# Altium PCB DE-290817.PcbDoc (part 1 of 2)
Units mil, origin at the board's own origin, x right, y up, seen from the top; angles counter-clockwise.
Board outline 2755.91 x 5118.11 mil, 2 copper layers (Top Layer, Bottom Layer); 176 components, 108 nets, 554 pads, 271 vias.
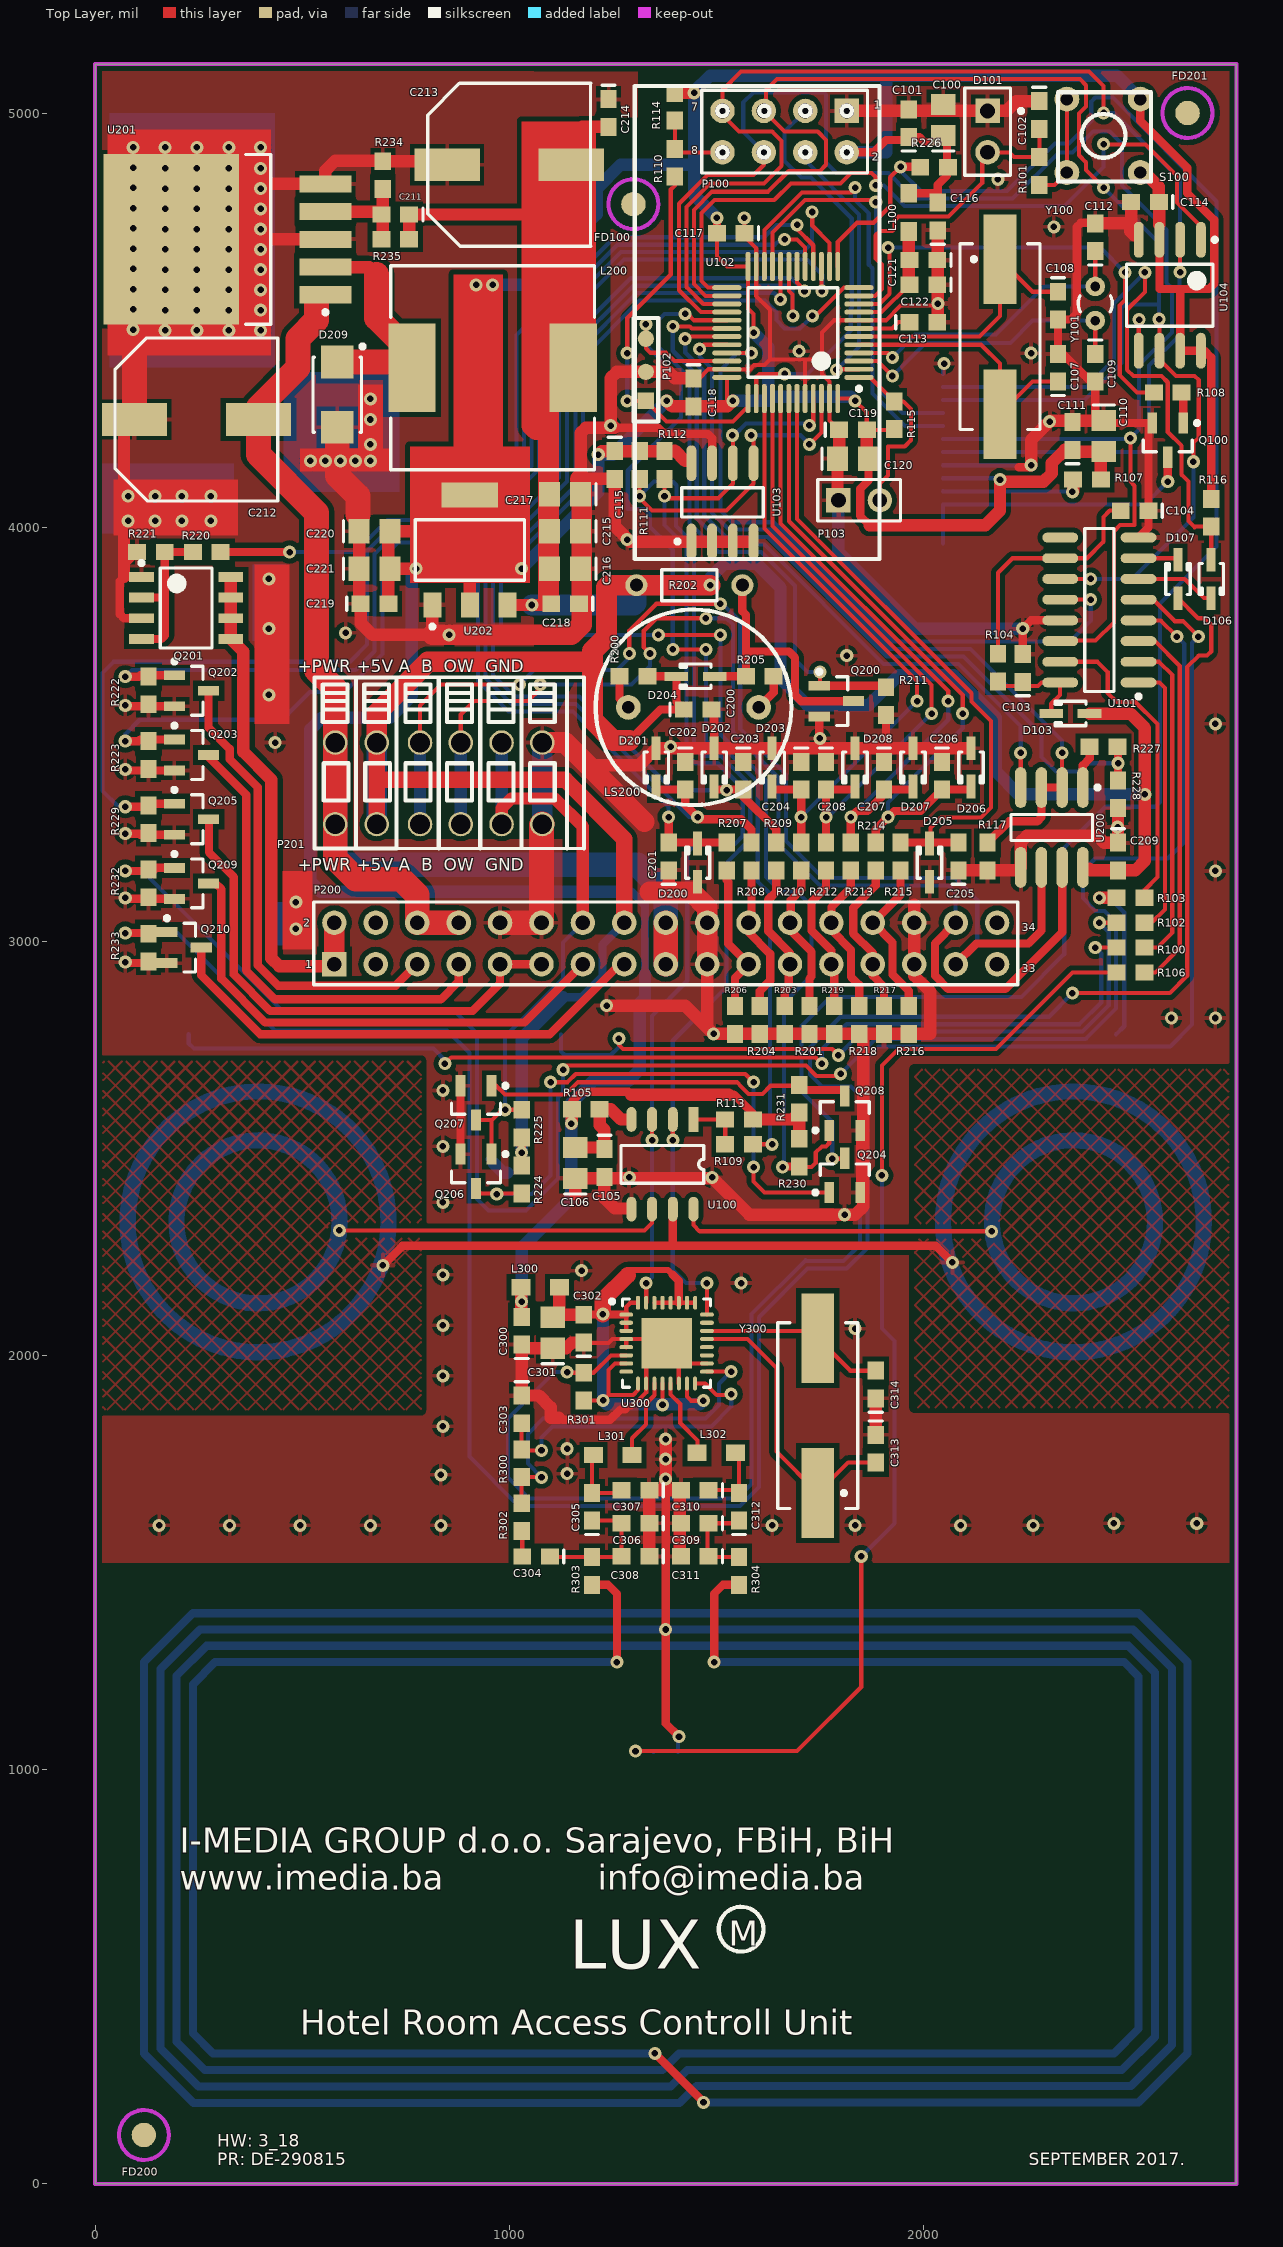
[diagram p0: Top Layer view]
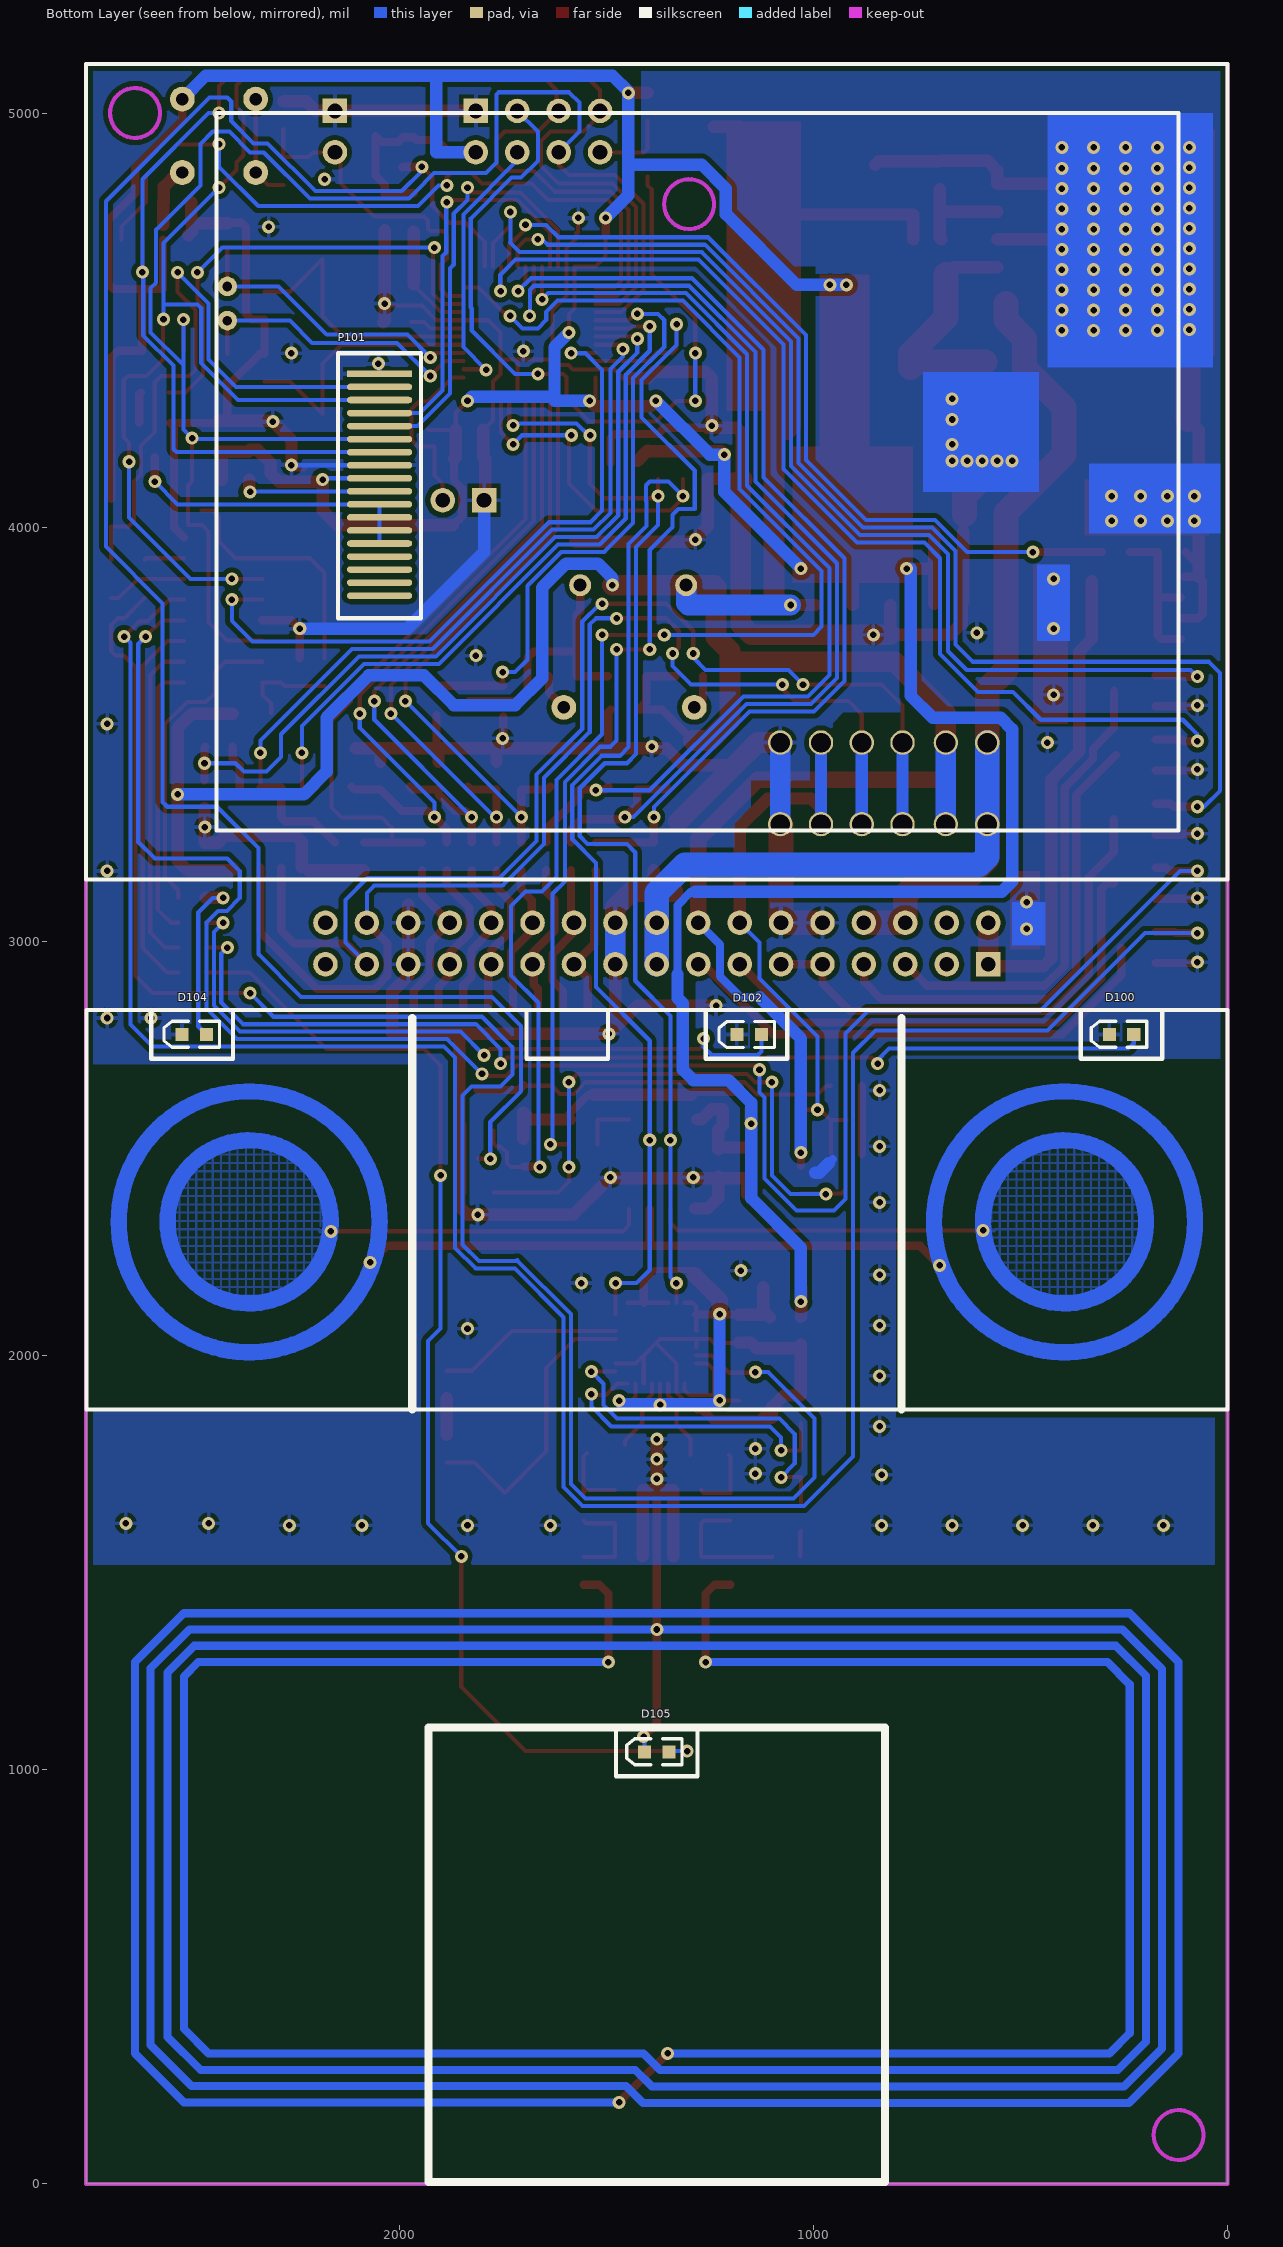
[diagram p1: Bottom Layer view, seen from below]

## Layer stack, top to bottom
Top Solder: solder mask 0.4, Solder Resist, Dk 3.5
Top Layer: signal copper 1.4
Dielectric 1: dielectric 12.6, FR-4, Dk 4.8
Bottom Layer: signal copper 1.4
Bottom Solder: solder mask 0.4, Solder Resist, Dk 3.5

## Board outline
0,0 2755.91,0 2755.91,5118.11 0,5118.11

## Design rules (kind name [scope] priority, off if disabled: settings)
Clearance [All] p1: gap=8 except(5: Arc-SMDPad Track-SMDPad SMDPad-SMDPad; 10: Arc-Arc; 12: Arc-Fill Arc-Poly Track-Fill Track-Poly SMDPad-Fill SMDPad-Poly THPad-Fill THPad-Poly Via-Fill Via-Poly Fill-Fill Fill-Poly Poly-Poly)
PolygonConnect [All] p1: connectstyle=Relief reliefconductorwidth=10 reliefentries=4 polygonreliefangle="90 Angle" airgapwidth=10
RoutingVias [All] p1: holewidth=28 width=50 viastyle="Through Hole" minholewidth=28 minwidth=50 maxholewidth=28 maxwidth=50
SolderMaskExpansion [All] p1: expansion=4
Width [All] p1: maxlimit=157.48 minlimit=5 preferedwidth=30
30 further rules are at their usual default settings.

## Classes and differential pairs
component class DE-290817_03: C300 C301 C302 C303 C304 C305 C306 C307 C308 C309 C310 C311 C312 C313 C314 L300 L301 L302 R300 R301 R302 R303 R304 U300 Y300
component class DE-290817_02: C200 C201 C202 C203 C204 C205 C206 C207 C208 C209 C211 C212 C213 C214 C215 C216 C217 C218 C219 C220 C221 D200 D201 D202 D203 D204 D205 D206 D207 D208 D209 FD200 FD201 L200 LS200 P200 P201 Q200 Q201 Q202 Q203 Q204 Q205 Q206 Q207 Q208 Q209 Q210 R200 R201 R202 R203 R204 R205 R206 R207 R208 R209 R210 R211 R212 R213 R214 R215 R216 R217 R218 R219 R220 R221 R222 R223 R224 R225 R226 R227 R228 R229 R230 R231 R232 R233 R234 R235 U200 U201 U202
component class DE-290817_01: C100 C101 C102 C103 C104 C105 C106 C107 C108 C109 C110 C111 C112 C113 C114 C115 C116 C117 C118 C119 C120 C121 C122 D100 D101 D102 D103 D104 D105 D106 D107 FD100 L100 P100 P101 P102 P103 Q100 R100 R101 R102 R103 R104 R105 R106 R107 R108 R109 R110 R111 R112 R113 R114 R115 R116 R117 S100 U100 U101 U102 U103 U104 Y100 Y101

## Components (designator, comment, footprint, x,y, rotation, side; value= is the part's Value field where it differs from the comment)
C100 "10uF" 0805 2048,4983 r90 top
C101 "100nF" 0603 1965,4975 r90 top
C102 "100nF" 0603 2280,4995 r270 top
C103 "100nF" 0603 2240,3660 r90 top
C104 "100nF" 0603 2510,4040 r180 top
C105 "100nF" 0603 1230,2465 r270 top
C106 "10uF" 0805 1160,2465 r90 top
C107 "22pF" 0603 2325,4385 r90 top
C108 "22pF" 0603 2325,4535 r270 top
C109 "6p8" 0603 2415,4385 r270 top
C110 "10uF" 0805 2435,4220 r270 top
C111 "100nF" 0603 2360,4220 r90 top
C112 "6p8" 0603 2415,4700 r90 top
C113 "100nF" 0603 2000,4495 r0 top
C114 "100nF" 0603 2535,4785 r180 top
C115 "100nF" 0603 1255,4150 r270 top
C116 "100nF" 0603 2035,4750 r90 top
C117 "100nF" 0603 1535,4710 r180 top
C118 "100nF" 0603 1445,4325 r270 top
C119 "100nF" 0603 1830,4235 r0 top
C120 "10uF" 0805 1830,4165 r0 top
C121 "1uF" 0603 2000,4645 r180 top
C122 "100nF" 0603 2000,4585 r180 top
C200 "100nF" 0603 1455,3560 r0 top
C201 "100nF" 0603 1385,3205 r90 top
C202 "100nF" 0603 1425,3400 r270 top
C203 "100nF" 0603 1565,3400 r270 top
C204 "100nF" 0603 1705,3400 r270 top
C205 "100nF" 0603 2085,3205 r90 top
C206 "100nF" 0603 2045,3400 r270 top
C207 "100nF" 0603 1905,3400 r270 top
C208 "100nF" 0603 1765,3400 r270 top
C209 "100nF" 0603 2470,3205 r270 top
C211 "22nF" 0603 725,4755 r180 top
C212 "220uF/50V" EEEHA1H101P 245,4260 r180 top
C213 "220uF/16V" EEEHA1H101P 1000,4875 r180 top
C214 "100nF" 0603 1240,5000 r270 top
C215 "10uF" 0805 1135,3990 r180 top
C216 "10uF" 0805 1135,3900 r180 top
C217 "10uF" 0805 1135,4080 r180 top
C218 "100nF" 0603 1135,3815 r180 top
C219 "100nF" 0603 675,3815 r0 top
C220 "10uF" 0805 675,3990 r0 top
C221 "10uF" 0805 675,3900 r0 top
C300 "100nF" 0603 1030,2060 r90 top
C301 "10uF" 0805 1105,2055 r90 top
C302 "100nF" 0603 1180,2065 r90 top
C303 "100nF" 0603 1030,1870 r270 top
C304 "1nF" 0603 1065,1515 r180 top
C305 "22pF" 0603 1200,1635 r90 top
C306 "NF" 0603 1305,1595 r180 top
C307 "220pF" 0603 1305,1675 r180 top
C308 "100pF" 0603 1305,1515.43 r180 top
C309 "NF" 0603 1448,1595 r180 top
C310 "220pF" 0603 1448,1675 r180 top
C311 "100pF" 0603 1448,1515.43 r180 top
C312 "22pF" 0603 1555,1635 r90 top
C313 "15pF" 0603 1885,1775 r270 top
C314 "15pF" 0603 1885,1930 r90 top
D100 "LED_BLUE" 1.6X0.8X0.8 255.91,2775.59 r0 bottom locked
D101 "NTC 10K" PIN2 2155,5005 r270 top
D102 "LED_RED" 1.6X0.8X0.8 1155,2775 r0 bottom locked
D103 "1N4148" SOD323 2355,3550 r180 top
D104 "LED_GREEN" 1.6X0.8X0.8 2495,2775.59 r0 bottom locked
D105 "LED_WHITE" 1.6X0.8X0.8 1377.95,1043.31 r0 bottom
D106 "1N4148" SOD323 2695,3875 r270 top
D107 "1N4148" SOD323 2615,3875 r90 top
D200 "3V3" SOD323 1455,3190 r90 top
D201 "3V3" SOD323 1355,3420 r270 top
D202 "3V3" SOD323 1495,3420 r270 top
D203 "3V3" SOD323 1635,3420 r270 top
D204 "1N4148" SOD323 1450,3640 r180 top
D205 "3V3" SOD323 2015,3190 r90 top
D206 "3V3" SOD323 2115,3420 r270 top
D207 "3V3" SOD323 1975,3420 r270 top
D208 "3V3" SOD323 1835,3420 r270 top
D209 "SR3100" ONSC-SMA-2-403D-02_C_V 585,4320 r270 top
FD100 "Fiducial" Fiducial 1300,4780 r180 top
FD200 "Fiducial" Fiducial 118.11,118.11 r270 top
FD201 "Fiducial" Fiducial 2637.8,5000 r270 top
L100 "120R" SMD-0805 1965,4760 r270 top
L200 "wurth WE-PD=744770133" WE-PD-XL 960,4385 r0 top
L300 "74279207" SMD-0805 1075,2165 r0 top
L301 "560nH/300mA" SMD-0805 1250,1760 r180 top
L302 "560nH/300mA" SMD-0805 1500,1765 r0 top
LS200 "Buzzer 5Vdc" BUZZER 1445,3565 r0 top
P100 "NRF24L01" HDR2X4 1815,5005 r180 top
P101 "SPI TFT DISPLAY" "DISPLAY CON" 2047.24,4370.08 r270 bottom locked
P102 "ICSP" ICSP 1330,4375 r90 top
P103 "RTC BATTERY" HDR1X2 1795,4065 r0 top
P200 "CON 1" HDR2X17 577.95,2945 r0 top
P201 "FB241" FB241_6 1080,3480 r270 top
Q100 "MMBT2222" SOT23_N 2590,4210 r270 top
Q200 "2N7002" SOT23_N 1790,3580 r0 top
Q201 "STS4DNF60L" ONSC-SOIC-8-751-07_V 220,3805 r0 top
Q202 "AO3400" SOT23_N 233,3605 r0 top
Q203 "AO3400" SOT23_N 233,3450 r0 top
Q204 "2N7002" SOT23_N 1810,2435 r90 top
Q205 "AO3400" SOT23_N 233,3295 r0 top
Q206 "2N7002" SOT23_N 920,2445 r270 top
Q207 "2N7002" SOT23_N 920,2610 r270 top
Q208 "2N7002" SOT23_N 1810,2585 r90 top
Q209 "AO3400" SOT23_N 233,3140 r0 top
Q210 "AO3400" SOT23_N 215,2985 r0 top
R100 "120R" ERA-0603 2500,2985 r0 top
R101 "100K" ERA-0603 2280,4860 r90 top
R102 "220R" ERA-0603 2500,3045 r0 top
R103 "120R" ERA-0603 2500,3105 r0 top
R104 "100K" ERA-0603 2180,3661 r90 top
R105 "100R" ERA-0603 1185,2595 r180 top
R106 "120R" ERA-0603 2500,2925 r0 top
R107 "4R7" ERA-0603 2395,4115 r180 top
R108 "1K" ERA-0603 2590,4325 r0 top
R109 "1K" ERA-0603 1555,2510 r180 top
R110 "1K" ERA-0603 1400,4880 r90 top
R111 "4K7" ERA-0603 1315,4150 r90 top
R112 "4K7" ERA-0603 1375,4150 r90 top
R113 "10K" ERA-0603 1555,2570 r0 top
R114 "10K" ERA-0603 1400,5015 r90 top
R115 "NF" ERA-0603 1930,4270 r270 top
R116 "10K" ERA-0603 2695,4035 r90 top
R117 "10K" ERA-0603 2155,3205 r270 top
R200 "0R" ERA-0603 1300,3640 r0 top
R201 "10K" ERA-0603 1725,2810 r270 top
R202 "NF" RD3.2x1.7 1435,3860 r180 top
R203 "10K" ERA-0603 1665,2810 r270 top
R204 "10K" ERA-0603 1605,2810 r270 top
R205 "0R" ERA-0603 1605,3640 r180 top
R206 "10K" ERA-0603 1545,2810 r270 top
R207 "10K" ERA-0603 1525,3205 r90 top
R208 "10K" ERA-0603 1585,3205 r90 top
R209 "10K" ERA-0603 1645,3205 r90 top
R210 "10K" ERA-0603 1705,3205 r90 top
R211 "10K" ERA-0603 1910,3580 r90 top
R212 "10K" ERA-0603 1765,3205 r90 top
R213 "10K" ERA-0603 1825,3205 r90 top
R214 "10K" ERA-0603 1885,3205 r90 top
R215 "10K" ERA-0603 1945,3205 r90 top
R216 "10K" ERA-0603 1965,2810 r270 top
R217 "10K" ERA-0603 1905,2810 r270 top
R218 "10K" ERA-0603 1845,2810 r270 top
R219 "10K" ERA-0603 1785,2810 r270 top
R220 "10R" ERA-0603 270,3940 r0 top
R221 "10K" ERA-0603 135,3940 r180 top
R222 "10K" ERA-0603 129,3606 r90 top
R223 "10K" ERA-0603 129,3450 r90 top
R224 "2K2" ERA-0603 1030,2425 r270 top
R225 "2K2" ERA-0603 1030,2560 r270 top
R226 "2K2" ERA-0603 2026,4869 r180 top
R227 "1K2" ERA-0603 2435,3470 r0 top
R228 "2K2" ERA-0603 2470,3355 r270 top
R229 "10K" ERA-0603 129,3295 r90 top
R230 "2K2" ERA-0603 1700,2490 r90 top
R231 "2K2" ERA-0603 1700,2620 r270 top
R232 "10K" ERA-0603 129,3140 r90 top
R233 "10K" ERA-0603 129,2985 r90 top
R234 "3K3" ERA-0603 695,4850 r90 top
R235 "10K" ERA-0603 725,4695 r0 top
R300 "1K8" 3-0603 1030,1740 r270 top
R301 "10K" ERA-0603 1180,1925 r270 top
R302 "1K8" 3-0603 1030,1610 r90 top
R303 "1R8" 3-0603 1200,1480 r90 top
R304 "1R8" 3-0603 1555,1480 r90 top
S100 "TAMPER" TACTILE_SWITCH 2435,4945 r0 top
U100 "CAP1293" SOP8 1445,2570 r270 top
U101 "SN74HC595D" D016_N 2425,3800 r180 top
U102 "STM32F103C8T6" STM-LQFP48_N 1685,4470 r180 top
U103 "FT24C128A" SOIC-SN8_N 1515,4060 r90 top
U104 "W25Q64" SOIJ-SM8_N 2595,4560 r270 top
U200 "MAX485ESA" NSO8_M 2310,3275 r270 top
U201 "LM2596S-ADJ" TS5B_N 320,4695 r180 top
U202 "REG1117-3.3" ZZ311 905,3945 r0 top
U300 "MFRC522" QFN32 1380,2030 r0 top
Y100 "8MHz" HC49/4H_SMX 2185,4460 r270 top
Y101 "32.768MHz" R26 2415,4540 r0 top
Y300 "27,12 MHz" HC49/4H_SMX 1745,1855 r90 top

## Footprints (in the part's own frame and the unit in brackets; to place one, negate y for a bottom-side part, rotate by r counter-clockwise, add the part's x,y. Pads: shape width x height; smd on the part's side, far side on the other; paste and mask are expansions set on the pad)
1.6X0.8X0.8 [mm] "SM LED; 2 Flat Leads"
  rect 0.8x0.8 smd: 1(-0.75,0) 2(0.75,0)
  silkscreen extent -1.55,-0.8 1.85,0.8, body extent -1.65,-0.9 1.95,0.9, height 2
3-0603 [mm] "Chip Resistor; Body 1.6 x 0.9 mm (LxW typ)"
  rect 1.1x1 smd: 1(-0.85,0) 2(0.85,0)
0603 [mm] "Chip Capacitor; Body 1.6 x 0.8 mm (LxW typ)"
  rect 1.1x1 smd: 1(-0.85,0) 2(0.85,0)
  silkscreen extent -1.7,-0.4 -1.7,0.4
0805 [mm] "Chip Capacitor; Body 2.0 x 1.2 mm (LxW typ)"
  rect 1.3x1.5 smd: 1(-0.95,0) 2(0.95,0)
  silkscreen extent -1.9,-0.65 -1.9,0.65
BUZZER [mil] "5Vdc PCB buzzer"
  round 60 hole 30: 1(-157.48,0) 2(157.48,0)
  silkscreen extent -236,-236 236,236, body extent -236,-236 236,236, height 378
D016_N [mm] "SOIC, 16-Leads, Body 9.9x3.9mm, Pitch 1.27mm, IPC Medium Density"
  oval 2.2x0.6 smd: 1(-2.4,4.445) 2(-2.4,3.175) 3(-2.4,1.905) 4(-2.4,0.635) 5(-2.4,-0.635) 6(-2.4,-1.905) 7(-2.4,-3.175) 8(-2.4,-4.445) 9(2.4,-4.445) 10(2.4,-3.175) 11(2.4,-1.905) 12(2.4,-0.635) 13(2.4,0.635) 14(2.4,1.905) 15(2.4,3.175) 16(2.4,4.445)
  silkscreen extent -2.53,-5 0.9,5.42, body extent -1.95,-4.95 1.95,4.95, height 1.75
"DISPLAY CON" [mm] "Display ILI9431 240x320 solderable connector"
  rect 0.4x4 smd: 1(0,0)
  oval 0.4x4 smd: 2(0.8,0) 3(1.6,0) 4(2.4,0) 5(3.2,0) 6(4,0) 7(4.8,0) 8(5.6,0) 9(6.4,0) 10(7.2,0) 11(8,0) 12(8.8,0) 13(9.6,0) 14(10.4,0) 15(11.2,0) 16(12,0) 17(12.8,0) 18(13.6,0)
  silkscreen extent -1.27,-2.54 14.99,2.54
EEEHA1H101P [mm]
  rect 4x2 smd: 1(-3.8,0) 2(3.8,0)
  silkscreen extent -5,-5 5,5, body extent -5,-5 5,5, height 10
ERA-0603 [mm] "Chip Resistor; Body 1.6 x 0.8 mm (LxW typ)"
  rect 1.1x1 smd: 1(-0.85,0) 2(0.85,0)
FB241_6 [mm] "PCB MOUNT TERMINAL BLOCK 2.5MM PITCH"
  round 1.5 hole 1.2: 1(0,0) 1(5,0) 2(0,-2.5) 2(5,-2.5) 3(0,-5) 3(5,-5) 4(0,-7.5) 4(5,-7.5) 5(0,-10.16) 5(5,-10.16) 6(0,-12.7) 6(5,-12.7)
  silkscreen extent -4,-13.97 6.5,2.55, body extent -4.06,-13.97 6.6,2.54, height 13.8
Fiducial [mm] "Pick and place machine mark"
  round 1.5 smd paste+0 mask+0.8: 3(0,0)
  Keep-Out Layer circle w0.254: c0,0 r1.529
HC49/4H_SMX [mm] "Surface Mount Quartz Crystal; Body 13.4 (inc. leads) x 4.9 mm (LxW max)"
  rect 5.5x2 smd: 1(-4.75,0) 2(4.75,0)
  silkscreen extent -5.7,-2.45 5.7,2.45, body extent -7.6,-2.55 7.6,2.55, height 4.3
HDR1X2 [mm] "Connector; Header; 2 Position"
  rect 1.5x1.5 hole 0.9: 1(0,0)
  round 1.5 hole 0.9: 2(2.54,0)
  silkscreen extent -1.27,-1.27 3.81,1.27
HDR2X4 [mm] "Connector; Header; 4x2 Position"
  rect 1.5x1.5 hole 0.9: 1(0,0)
  round 1.5 hole 0.9: 2(0,2.54) 3(2.54,0) 4(2.54,2.54) 5(5.08,0) 6(5.08,2.54) 7(7.62,0) 8(7.62,2.54)
  silkscreen extent -1.27,-1.27 8.89,3.81
HDR2X17 [mm] "Connector; Header; 17x2 Position"
  rect 1.5x1.5 hole 0.9: 1(0,0)
  round 1.5 hole 0.9: 2(0,2.54) 3(2.54,0) 4(2.54,2.54) 5(5.08,0) 6(5.08,2.54) 7(7.62,0) 8(7.62,2.54) 9(10.16,0) 10(10.16,2.54) 11(12.7,0) 12(12.7,2.54) 13(15.24,0) 14(15.24,2.54) 15(17.78,0) 16(17.78,2.54) 17(20.32,0) 18(20.32,2.54) 19(22.86,0) 20(22.86,2.54) 21(25.4,0) 22(25.4,2.54) 23(27.94,0) 24(27.94,2.54) 25(30.48,0) 26(30.48,2.54) 27(33.02,0) 28(33.02,2.54) 29(35.56,0) 30(35.56,2.54) 31(38.1,0) 32(38.1,2.54) 33(40.64,0) 34(40.64,2.54)
  silkscreen extent -1.27,-1.27 41.91,3.81, body extent -1.37,-1.37 42.01,3.91, height 6
ICSP [mm] "3 PIN ICSP PROGRAMMER CONNECTION PADS"
  rect 1x1 smd: 1(-1.778,0)
  round 1 smd: 2(0,0) 3(2.032,0)
  silkscreen extent -3.05,-0.76 3.3,0.76
NSO8_M [mm] "SOIC, 8-Leads, Body 4.9x3.9mm, Pitch 1.27mm, IPC Low Density"
  oval 2.5x0.7 smd: 1(-2.45,1.905) 2(-2.45,0.635) 3(-2.45,-0.635) 4(-2.45,-1.905) 5(2.45,-1.905) 6(2.45,-0.635) 7(2.45,0.635) 8(2.45,1.905)
  silkscreen extent -2.57,-2.5 0.8,2.93, body extent -2,-2.5 2,2.5, height 1.75
ONSC-SMA-2-403D-02_C_V [mm] "Molded, 2-Leads, Body 4.57x2.92mm"
  rect 2x2 smd: 1(-2,0) 2(2,0)
  silkscreen extent -3.07,-1.48 2.3,1.68, body extent -2.29,-1.46 2.28,1.46, height 2.41
ONSC-SOIC-8-751-07_V [mm] "SOIC, 8-Leads, Body 4.9x3.9mm, Pitch 1.27mm"
  rect 1.52x0.6 smd: 1(-2.74,1.905) 2(-2.74,0.635) 3(-2.74,-0.635) 4(-2.74,-1.905) 5(2.74,-1.905) 6(2.74,-0.635) 7(2.74,0.635) 8(2.74,1.905)
  silkscreen extent -2.86,-2.45 1.58,2.88, body extent -1.95,-2.45 1.95,2.45, height 1.75
PIN2 [mm] "Photosensitive Diode; 2 Leads"
  rect 1.5x1.5 hole 0.9: 1(0,0)
  round 1.5 hole 0.9: 2(2.54,0)
  silkscreen extent -1.4,-1.4 3.94,2.18
QFN32 [mm] "32 pin QFN"
  oval 0.85x0.25 smd: 1(-2.475,1.75) 2(-2.475,1.25) 3(-2.475,0.75) 4(-2.475,0.25) 5(-2.475,-0.25) 6(-2.475,-0.75) 7(-2.475,-1.25) 8(-2.475,-1.75) 17(2.475,-1.75) 18(2.475,-1.25) 19(2.475,-0.75) 20(2.475,-0.25) 21(2.475,0.25) 22(2.475,0.75) 23(2.475,1.25) 24(2.475,1.75)
  oval 0.25x0.85 smd: 9(-1.75,-2.475) 10(-1.25,-2.475) 11(-0.75,-2.475) 12(-0.25,-2.475) 13(0.25,-2.475) 14(0.75,-2.475) 15(1.25,-2.475) 16(1.75,-2.475) 25(1.75,2.475) 26(1.25,2.475) 27(0.75,2.475) 28(0.25,2.475) 29(-0.25,2.475) 30(-0.75,2.475) 31(-1.25,2.475) 32(-1.75,2.475)
  rect 3.1x3.1 smd: 33(0,0)
  silkscreen extent -3.47,-2.7 2.7,2.7, body extent -2.55,-2.55 2.55,2.55, height 0.8
R26 [mm] "Crystal, Thru-Hole; 2 Leads; Body 2.1 x 6.2 mm (Dia.xH)"
  round 1.2 hole 0.6: 1(0,1.05) 2(0,-1.05)
  silkscreen extent -1.05,-0.53 1.05,0.48
RD3.2x1.7 [mm] "Resistor, Axial; Body 3.4 x 1.9 mm (LxDia. max), Lead Dia. 0.5 mm (max)"
  round 1.35 hole 0.8: 1(-3.25,0) 2(3.25,0)
  silkscreen extent -1.7,-0.95 1.7,0.95
SMD-0805 [mm] "Chip Inductor, 2-Leads, Body 2.0x1.2mm"
  rect 1.15x1 smd: 1(-1.175,0) 2(1.175,0)
  body extent -1,-0.6 1,0.6, height 1.1
SOD323 [mm] "SOD-323/SC-76; 2 Leads; Body 1.7 x 1.3 mm, (LxW)"
  rect 1.45x0.55 smd: 1(1.175,0) 2(-1.175,0)
  silkscreen extent -0.95,-0.75 0.95,0.75
SOIC-SN8_N [mm] "SOIC, 8-Leads, Body 4.9x3.8mm, Pitch 1.27mm, IPC Medium Density"
  oval 2.2x0.6 smd: 1(-2.4,1.905) 2(-2.4,0.635) 3(-2.4,-0.635) 4(-2.4,-1.905) 5(2.4,-1.905) 6(2.4,-0.635) 7(2.4,0.635) 8(2.4,1.905)
  silkscreen extent -2.52,-2.5 0.9,2.88, body extent -2,-2.5 2,2.5, height 1.75
SOIJ-SM8_N [mm] "SOP, 8-Leads, Body 5.2x5.2mm, Pitch 1.27mm, IPC Medium Density"
  oval 2.2x0.6 smd: 1(-3.4,1.905) 2(-3.4,0.635) 3(-3.4,-0.635) 4(-3.4,-1.905) 5(3.4,-1.905) 6(3.4,-0.635) 7(3.4,0.635) 8(3.4,1.905)
  silkscreen extent -3.52,-2.65 1.9,2.88, body extent -2.69,-2.67 2.69,2.67, height 2.04
SOP8 [mm]
  rect 1.52x0.61 smd: 1(0,0)
  oval 1.52x0.61 smd: 2(0,-1.27) 3(0,-2.54) 4(0,-3.81) 5(5.5,-3.81) 6(5.5,-2.54) 7(5.5,-1.27) 8(5.5,0)
  silkscreen extent 1.59,-4.44 3.91,0.64, body extent -0.86,-4.54 6.36,0.73
SOT23_N [mm] "SOT23, 3-Leads, Body 2.9x1.3mm, Pitch 0.95mm, Lead Span 2.3mm, IPC Medium Density"
  rect 1.3x0.6 smd: 1(-1.05,0.95) 2(-1.05,-0.95) 3(1.05,0)
  silkscreen extent -1.17,-1.5 0.7,1.93, body extent -0.7,-1.5 0.7,1.5, height 1.1
STM-LQFP48_N [mm] "QFP, 48-Leads, Body 7x7mm, Pitch 0.5mm, IPC Medium Density"
  oval 1.8x0.3 smd: 1(-4.05,2.75) 2(-4.05,2.25) 3(-4.05,1.75) 4(-4.05,1.25) 5(-4.05,0.75) 6(-4.05,0.25) 7(-4.05,-0.25) 8(-4.05,-0.75) 9(-4.05,-1.25) 10(-4.05,-1.75) 11(-4.05,-2.25) 12(-4.05,-2.75) 25(4.05,-2.75) 26(4.05,-2.25) 27(4.05,-1.75) 28(4.05,-1.25) 29(4.05,-0.75) 30(4.05,-0.25) 31(4.05,0.25) 32(4.05,0.75) 33(4.05,1.25) 34(4.05,1.75) 35(4.05,2.25) 36(4.05,2.75)
  oval 0.3x1.8 smd: 13(-2.75,-4.05) 14(-2.25,-4.05) 15(-1.75,-4.05) 16(-1.25,-4.05) 17(-0.75,-4.05) 18(-0.25,-4.05) 19(0.25,-4.05) 20(0.75,-4.05) 21(1.25,-4.05) 22(1.75,-4.05) 23(2.25,-4.05) 24(2.75,-4.05) 37(2.75,4.05) 38(2.25,4.05) 39(1.75,4.05) 40(1.25,4.05) 41(0.75,4.05) 42(0.25,4.05) 43(-0.25,4.05) 44(-0.75,4.05) 45(-1.25,4.05) 46(-1.75,4.05) 47(-2.25,4.05) 48(-2.75,4.05)
  silkscreen extent -4.18,-2.75 2.75,3.57, body extent -3.5,-3.5 3.5,3.5, height 1.6
TACTILE_SWITCH [mil] "PCB push button"
  round 60 hole 30: 1(-88.58,88.58) 2(88.58,88.58) 3(88.58,-88.58) 4(-88.58,-88.58)
  silkscreen extent -110,-110 115,105, body extent -110,-110 120,110, height 197
TS5B_N [mm] "D2-PAK, 6-Leads, Body 8.6x10.2mm, Pitch 1.7mm, Lead Span 14.1mm, IPC Medium Density"
  rect 3.2x1.05 smd: 1(-6,3.4) 2(-6,1.7) 3(-6,0) 4(-6,-1.7) 5(-6,-3.4)
  rect 8.3x10.45 smd: 6(3.45,0)
  silkscreen extent -6.13,-5.2 -1.1,5.2, body extent -2.65,-5.2 6.24,5.2, height 4.65
WE-PD-XL [mm] "SMD Inductor, 2-Leads, Body 12.0x12.0x8.0 mm"
  rect 2.9x5.4 smd: 1(-4.95,0) 2(4.95,0)
  silkscreen extent -6.25,-6.25 6.25,6.25, body extent -6,-6 6,6, height 8
ZZ311 [mm] "SOT-223/SC-73; 4 Leads; Body 6.7 x 7.3 mm, inc. leads (LxW max)"
  rect 1.1x1.55 smd: 1(-2.3,-3.375) 2(0,-3.375) 3(2.3,-3.375)
  rect 3.45x1.55 smd: 4(0,3.375)
  silkscreen extent -3.35,-4.82 3.35,1.85

## Part data
C100 C106 C110 C120 C215 C216 C217 C220 C221 C301: library part C0805, "Ceramic Chip Capacitor - Standard"
C101 C102 C103 C104 C105 C107 C108 C109 C111 C112 C113 C114 C115 C116 C117 C118 C119 C121 C122 C200 C201 C202 C203 C204 C205 C206 C207 C208 C209 C211 C214 C218 C219 C300 C302 C303 C304 C305 C306 C307 C308 C309 C310 C311 C312 C313 C314: library part C0603, "Ceramic Chip Capacitor - Standard"
C212: library part EEEHA1H101P, "Aluminum Electrolytic Capacitors (SMD Type)"
C213: library part EEEHA1C221P, "Aluminum Electrolytic Capacitors (SMD Type)"
D100 D102 D104 D105: library part HSMZ-C190, "High Performance Chip LED, Red"
D101: library part "Photo Sen", "Photosensitive Diode"
D103 D106 D107 D200 D201 D202 D203 D205 D206 D207 D208: library part 1PS76SB10, "Schottky Barrier Diode"
D204: library part BAS321, "General-purpose Diode"
D209: library part MBRA320T3G, "Schottky Power Rectifier, 2-Pin SMA, Pb-Free, Tape and Reel"
FD100 FD200 FD201: library part Fiduchial, "Fiduchial mark"
L100: library part 74279202, "SMD EMI Suppression Ferrite Bead WE-CBF, Z = 120 Ohm"
L200: library part 744770133, "SMD-Shielded Power Inductor WE-PD, L = 33 µH"
L300: "SMD EMI Suppression Ferrite Bead WE-CBF, Z = 100 Ohm"
L301 L302: library part 74279207, "SMD EMI Suppression Ferrite Bead WE-CBF, Z = 100 Ohm"
LS200: library part BUZZER, "5Vdc PCB buzzer"
P100: library part "Header 4X2", "Header, 4-Pin, Dual row"
P101: library part "DISPLAY CONNECTOR", "DISPLAY ILI9341 240x320  CONNECTOR"
P102: "ICSP connection pads"
P103: library part "Header 2", "Header, 2-Pin"
P200: library part "Header 17X2", "Header, 17-Pin, Dual row"
P201: library part "TERMINAL BLOCK 6", "PCB MOUNT TERMINAL BLOCK 2.5MM PITCH"
Q100: library part BC817, "NPN General-purpose Transistor"
Q200: "N-channel Enhancement Mode Field-effect Transistor"
Q201: library part NVMD6N04R2G, "Power MOSFET, 40 V, 5.8 A, Dual N-Channel, 8-Pin SOIC, Pb-Free, Tape and Reel"
Q202 Q203 Q205 Q209 Q210: library part 2N7002, "N-channel Enhancement Mode Field-effect Transistor"
Q204 Q206 Q207 Q208: library part BSS123, "N-channel Enhancement Mode Vertical D-MOSFET"
R100 R101 R102 R103 R104 R105 R106 R107 R108 R109 R110 R111 R112 R113 R114 R115 R116 R117 R200 R201 R203 R204 R205 R206 R207 R208 R209 R210 R211 R212 R213 R214 R215 R216 R217 R218 R219 R220 R221 R222 R223 R224 R225 R226 R227 R228 R229 R230 R231 R232 R233 R234 R235 R301: library part ERAV, "Metal Film Thermosensitive Chip Resistor, 0.56 Ohm to 10k Ohm Range, 5% Tolerance, 0603 Size, 0.063 W"
R202: library part ERD6FC, "Flame-Retardant Fuse Type Carbon Film Resistor, 4.7 Ohm to 1k Ohm Range, 2% and 5% Tolerance, 0.166 W"
R300 R302 R303 R304: library part ERJ3RS, "Low Ohmic Value Thick Film Chip Resistor, 0.1 Ohm to 0.2 Ohm Range, 1%, 2% and 5% Tolerance, 0603 Size, 0.1 W"
S100: library part TACKTILE_SWITCH
U100: "3-Channel Capacitive Touch Sensor with Proximity Detection & Signal Guard"
U101: "8-Bit Shift Register with 3-State Output Registers"
U102: "ARM Cortex-M3 32-bit MCU, 64 KB Flash, 20 KB Internal RAM, 37 I/Os, 48-pin LQFP, -40 to 85 degC, Tray"
U103: library part 24AA64/SN, "64Kbit, 400kHz, 1.7V, I2C Serial EEPROM, 8-Pin SOIC 150mil, Commercial Temperature"
U104: library part 25LC640A-I/SN, "64K SPI Bus Serial EEPROM, 8-Pin SOIC, Industrial Temperature"
U200: "Low-Power, Slew-Rate-Limited RS-485/RS-422 Transceiver"
U201: "SIMPLE SWITCHER® Power Converter 150 KHz 3A Step-Down Voltage Regulator, 5-pin TO-263"
U202: "800mA and 1A Low Dropout Positive Regulator 2.85V, 3.3V, 5V, and Adjustable"
U300: "MIFARE reader writer"
Y100: library part HC49/4H_SMX, "Surface Mount Quartz Crystal"
Y101: library part R26-32.768, "Tuning Fork Crystal Unit"
Y300: library part ECS-80-20-1, "Crystal Oscillator"

## Via types
v1: diameter 31.5, hole 15.75, Top Layer to Bottom Layer, 271 vias

## Nets (pads, with @x,y where several pads share a name; then routed paths per layer and width w, separated by ;. In a path a pad name is that pad's centre, name@x,y a point inside that pad or via, vN(x,y) a via of type N, cw(c..) or ccw(c..) an arc to the next point about the centre after c; other vN are vias at no path point)
+3V3: C100.1 C101.1 C110.2 C111.1 C114.1 C115.1 C116.2 C117.2 C118.2 C119.2 C120.2 C219.2 C220.2 C221.2 C300.2 L100.1 L300.1 P100.2 P101.9 R105.2 R107.1 R111.2 R112.2 R113.2 R114.2 R115.2 R116.2 R226.1 R230.2 R231.2 S100.2 S100.3 U102.24 U102.36 U102.48 U103.8 U104.3 U104.7 U104.8 U202.2 U202.4 | length 11911.1
  Top Layer w10: C117.2@1501.54,4710 1501.54,4653.46 1525.55,4629.45 U102.24@1576.73,4629.45 1576.73,4528.27 1590,4515 v1(1590,4470) ; 1525.55,4291.54 U102.36@1525.55,4361.73 ; U102.48@1793.27,4310.55 1829.45,4310.55 v1(1835,4305) 1863.46,4276.54 C119.2@1863.46,4235 1928.46,4235 R115.2@1930,4236.54
  Top Layer w20: R105.2@1151.54,2595 1151.54,2612.9 1175.64,2637 1288,2637 1295,2630 ; C117.2@1501.54,4710 v1(1501.54,4746.54) ; 1530,2630 1542.47,2630 1588.46,2584.01 R113.2@1588.46,2570 ; P100.2@1815,4905 1880,4905 1910,4935 C101.1@1958.46,4935 ; C120.2@1867.4,4165 1867.4,4112.4 1847.47,4092.47 1847.47,4027.53 1870,4005 ; L100.1@1965,4806.26 2031.74,4806.26 2035,4803 2035,4827 2057,4849 2057,4944.6 2042.4,4930 2002,4930 1990.46,4941.54 C101.1@1965,4941.54 ; S100.2@2523.58,5033.58 2523.58,4981.42 2637,4868 2637,4807 2702,4742 2702,4587 2690,4575 2620,4575 ; U104.3@2570,4693.86 2570,4575 2620,4575 ; R116.2@2695,4068.46 2695,4410 2678.86,4426.14 U104.8@2670,4426.14 U104.7@2620,4426.14 2620,4575
  Top Layer w30: C219.2@708.46,3815 708.46,3986.06 C220.2@712.4,3990 770,3990 ; C221.2@712.4,3900 v1(775,3900) v1@780,3900 ; U202.2@905,3812.13 U202.4@905,4077.87 ; L300.1@1028.74,2165 1028.74,2094.72 C300.2@1030,2093.46 ; v1(1150,2560) 1151.54,2561.54 R105.2@1151.54,2595 ; v1(1215,4175) 1223.46,4183.46 C115.1@1255,4183.46 R112.2@1375,4183.46 1401.54,4183.46 ; 1295,2630 1530,2630 ; v1(1380,4305) 1393.46,4291.54 C118.2@1445,4291.54 1525.55,4291.54 1526.54,4291.54 v1(1540,4305) ; 1400,4185 1425,4160 ; R114.2@1400,5048.46 v1(1446.54,5048.46) ; R113.2@1588.46,2570 1683.46,2570 R231.2@1700,2586.54 R230.2@1700,2523.46 ; C119.2@1863.46,4235 1863.46,4168.94 C120.2@1867.4,4165 ; 1870,4005 2150,4005 2185,4040 v1(2185,4115) 2190,4110 2290,4110 2310,4130 2310,4155 2341.54,4186.54 C111.1@2360,4186.54 2363.94,4182.6 C110.2@2435,4182.6 2428.46,4176.06 R107.1@2428.46,4115 ; S100.3@2523.58,4856.42 2525,4855 2535,4855 2568.46,4821.54 C114.1@2568.46,4785 2570,4783.46 U104.3@2570,4730
  Bottom Layer w10: P101.9@2047.24,4118.11 2181.89,4118.11 v1(2185,4115)
  Bottom Layer w20: 1285,3120 1295,3120 1327.95,3087.05 1327.95,2920.71
  Bottom Layer w30: v1@765,3900 765,3593 712,3540 548,3540 520,3512 520,3145 545,3120 1285,3120 ; v1(920,4585) 1040,4585 1211.03,4756.03 1211.03,4816.85 1269.18,4875 1446.54,4875 ; v1(1030,2130) 1030,2260 1150,2380 v1(1150,2560) 1150,2610 1205,2665 1290,2665 1315,2690 1315,2850 1327.95,2862.95 1327.95,2920.71 ; v1(1030,3900) 1215,4085 v1(1215,4175) 1250,4175 v1(1380,4305) ; v1(1501.54,4746.54) 1446.54,4801.54 1446.54,4875 ; v1(1540,4305) 1625,4305 ; v1(1590,4470) 1625,4435 1625,4315 1825,4315 v1(1835,4305) ; P100.2@1815,4905 1910,4905 1910,5090 ; 1945,5090 1910,5090 ; 1945,5090.11 2467.06,5090.11 S100.2@2523.58,5033.58 ; 1446.54,4875 v1(1446.54,5048.46) 1446.54,5051.54 1485,5090 1910,5090
  other v1: 960,4585
+5V: C200.1 C209.2 C211.1 C213.1 C214.2 C215.2 C216.2 C217.2 C218.2 D103.2 D204.1 L200.2 P200.16 P201.5 R200.2 R202.2 R224.1 R225.2 R235.2 U200.8 U202.3 | length 8175.4
  Top Layer w20: R224.1@1030,2458.46 v1(1030,2490) R225.2@1030,2526.54 ; 1305,3500 1365,3560 C200.1@1421.54,3560 1403.74,3577.8 D204.1@1403.74,3640 R200.2@1333.46,3640
  Top Layer w30: R235.2@758.46,4695 C211.1@758.46,4755 1045,4755 ; U202.3@995.55,3812.13 v1(1055,3812.13) 1098.66,3812.13 C218.2@1101.54,3815 1101.54,4076.06 C217.2@1097.6,4080 1097.6,4217.4 1080,4235 ; L200.2@1149.61,4390.28 L200.2@1154.88,4385 ; C213.1@1149.61,4875 1149.61,4939.61 1176.54,4966.54 C214.2@1240,4966.54 ; 2400,3175 2403.46,3171.54 C209.2@2470,3171.54 2511.54,3171.54 2535,3195 v1(2535,3355) 2535,3515 2500,3550 D103.2@2401.26,3550
  Top Layer w39.37: P201.5@680,3283.15 680,3390 ; P201.5@680,3480 680,3390 ; P200.16@1277.95,3045 1277.95,3247.05 1135,3390 680,3390
  Top Layer w50: P201.5@680,3480 680,3551 804,3675 1175,3675 ; 1055,4745 1055,4245 1065,4235 1080,4235 ; 1290,3485 1251,3485 1201,3535 1201,3701 1235,3735 1235,3855 1240,3860 R202.2@1307.05,3860 v1(1485,3860)
  Top Layer w60: L200.2@1149.61,4390.28 C213.1@1149.61,4875
  Bottom Layer w20: 1130,2865 1175,2865 1225.48,2915.48 1225.48,2992.53 P200.16@1277.95,3045
  Bottom Layer w30: v1(1030,2490) 1030,2765 1130,2865 ; v1(1485,3860) 1485,3877 1520,3912 1597.03,3912 1655,3854.03 1655,3635 1720,3570 1868,3570 1940,3642 2073.4,3642 2175,3540.4 2175,3410 2230,3355 v1(2535,3355)
  Bottom Layer w50: P201.5@680,3283.15 P201.5@680,3480 ; v1(1055,3812.13) 1302.13,3812.13 1307.05,3817.05 R202.2@1307.05,3860
+PWR: C212.1 P200.6 P200.8 P200.17 P200.18 P201.6 U201.1 | length 3257.6
  Top Layer w60: 535,4540 535,4500 490,4455 490,4385 394.61,4289.61 C212.1@394.61,4260 394.61,4175.39 535,4035 535,3655 580,3610 P201.6@580,3480 P201.6@580,3283.15 580,3200 630,3150 740,3150 777.95,3112.05 P200.6@777.95,3045 P200.8@877.95,3045 ; P200.17@1377.95,2945 P200.18@1377.95,3045
  Bottom Layer w60: P201.6@580,3480 P201.6@580,3283.15 580,3205 600,3185 1310,3185 1377.95,3117.05 P200.18@1377.95,3045 1377.95,2945.67 P200.17@1378.29,2945.33
AMBIENT_LIGHT: C102.2 D101.2 R101.2 U102.11 | length 796.7
  Top Layer w10: U102.11@1844.45,4558.58 1883.58,4558.58 1900,4575 1900,4634 1885,4649 1885,4705 1895,4715 1925,4715 1930,4720 1930,4740 1940,4750 2061,4750 2142,4831 2142,4892 D101.2@2155,4905 2208,4905 2219,4894 2279.46,4894 R101.2@2280,4893.46 C102.2@2280,4961.54
BUZZ_SP_1: LS200.1 R200.1 | length 83.7
  Top Layer w20: R200.1@1266.54,3640 1266.54,3585.98 LS200.1@1287.52,3565
BUZZ_SP_2: LS200.2 R205.1 | length 89.9
  Top Layer w20: LS200.2@1602.48,3565 1638.46,3600.98 R205.1@1638.46,3640
CAPS_ALERT: R109.2 R113.1 U100.1 | length 136.5
  Top Layer w10: U100.1@1445,2570 R113.1@1521.54,2570 R109.2@1521.54,2510
DIN0: C201.2 D200.1 R207.2 U102.18 | length 2436.7
  Top Layer w10: U102.18@1694.84,4629.45 1694.84,4590.61 1713,4572.46 v1(1713,4570)
  Top Layer w20: v1(1385,3300) C201.2@1385,3238.46 R207.2@1525,3238.46
  Bottom Layer w10: v1(1385,3300) 1385,3324.09 1154.09,3555 998.43,3555 925,3628.43 925,3925 1120,4120 1120,4428.37 1292.63,4601 1682,4601 v1(1713,4570)
DIN1: C202.2 D201.1 R208.2 U102.19 | length 2645.4
  Top Layer w10: U102.19@1675.16,4629.45 1675.16,4570.5 1684.25,4561.4 1684.25,4512.75 v1@1685,4512
  Top Layer w20: D201.1@1355,3373.74 1362.2,3366.54 C202.2@1425,3366.54 1425,3330 v1(1455,3300) 1460,3295 1560,3295 1585,3270 R208.2@1585,3238.46
  Bottom Layer w10: v1(1455,3300) 1434.54,3300 1161.54,3573 1005.89,3573 943,3635.89 943,3913 1140,4110 1140,4422.91 1300.09,4583 1674.54,4583 1684.25,4573.29 1684.25,4510.75 v1(1685,4510)
DIN2: C203.2 D202.1 R209.2 U102.20 | length 2412
  Top Layer w10: v1(1655,4550) 1655.47,4550.47 U102.20@1655.47,4629.45
  Top Layer w20: D202.1@1495,3373.74 1502.2,3366.54 C203.2@1565,3366.54 1565,3350 1645,3270 R209.2@1645,3238.46
  Bottom Layer w10: v1(1525,3365) 1395,3365 1169,3591 1013.34,3591 961,3643.34 961,3901 1160,4100 1160,4417.46 1307.54,4565 1640,4565 v1(1655,4550)
DIN3: C204.2 D203.1 R210.2 U102.39 | length 1480.4
  Top Layer w10: U102.39@1616.1,4310.55 1616.1,3997.07 1985,3628.18 v1(1985,3580)
  Top Layer w20: D203.1@1635,3373.74 1642.2,3366.54 C204.2@1705,3366.54 v1(1705,3300) R210.2@1705,3238.46
  Bottom Layer w10: v1(1705,3300) v1(1985,3580)
DIN4: C208.2 D208.1 R212.2 U102.40 | length 1479.3
  Top Layer w10: U102.40@1635.79,4310.55 1635.79,4002.85 2020,3618.63 v1(2020,3550)
  Top Layer w20: R212.2@1765,3238.46 v1(1765,3300) C208.2@1765,3366.54 1827.8,3366.54 D208.1@1835,3373.74
  Bottom Layer w10: v1(1765,3300) 1770,3300 v1(2020,3550)
DIN5: C207.2 D207.1 R213.2 U102.41 | length 1524.3
  Top Layer w10: U102.41@1655.47,4310.55 1655.47,4008.62 2060,3604.09 v1(2060,3580)
  Top Layer w20: R213.2@1825,3238.46 v1(1825,3300) 1840,3315 1865,3315 1905,3355 C207.2@1905,3366.54 1967.8,3366.54 D207.1@1975,3373.74
  Bottom Layer w10: v1(1825,3300) 2060,3535 v1(2060,3580)
DIN6: C206.2 D206.1 R214.2 U102.42 | length 1563.5
  Top Layer w10: U102.42@1675.16,4310.55 1675.16,4014.39 2095,3594.54 v1(2095,3550)
  Top Layer w20: R214.2@1885,3238.46 1885,3270 v1(1915,3300) 1930,3315 1993.46,3315 C206.2@2045,3366.54 2107.8,3366.54 D206.1@2115,3373.74
  Bottom Layer w10: v1(1915,3300) 1915,3335 2095,3515 v1(2095,3550)
DIN7: C205.2 D205.1 R215.2 U102.43 | length 1526.3
  Top Layer w10: U102.43@1694.84,4310.55 1694.84,4020.16 2116,3599 2116,3579 2163,3532 2163,3323 2139,3299 2042,3299 2017.2,3274.2 2017.2,3238.46 D205.1@2015,3236.26
  Top Layer w20: R215.2@1945,3238.46 2017.2,3238.46 C205.2@2085,3238.46
DIN_0: P200.21 R206.1 R207.1 | length 364.3
  Top Layer w20: R207.1@1525.48,3171.06 R207.1@1525,3171.54 1525,3148 1529,3144 1529,2993.95 P200.21@1577.95,2945 1545,2912.05 R206.1@1545,2843.46
DIN_1: P200.22 R204.1 R208.1 | length 362.9
  Top Layer w20: R208.1@1585,3171.54 1585,3052.05 P200.22@1577.95,3045 1577.95,3022.05 1630,2970 1630,2905 1605,2880 R204.1@1605,2843.46
DIN_2: P200.23 R203.1 R209.1 | length 363.3
  Top Layer w20: R209.1@1645,3171.54 1645,3120 1625.48,3100.48 1625.48,3024.52 1677.95,2972.05 P200.23@1677.95,2945 1675,2942.05 1675,2895 1665,2885 R203.1@1665,2843.46
DIN_3: P200.24 R201.1 R210.1 | length 362.9
  Top Layer w20: R210.1@1705,3171.54 1705,3125 1680,3100 1680,3047.05 P200.24@1677.95,3045 1677.95,3027.05 1730,2975 1730,2915 1725,2910 R201.1@1725,2843.46
DIN_4: P200.25 R212.1 R219.1 | length 365.4
  Top Layer w20: R212.1@1765,3171.54 1765,3130 1730,3095 1730,3025.74 1777.95,2977.79 P200.25@1777.95,2945 1785,2937.95 R219.1@1785,2843.46
DIN_5: P200.26 R213.1 R218.1 | length 375.3
  Top Layer w20: R213.1@1825,3171.54 1825,3130 1777.95,3082.95 P200.26@1777.95,3045 1777.95,3027.05 1825.48,2979.52 1825.48,2914.52 1845,2895 R218.1@1845,2843.46
DIN_6: P200.27 R214.1 R217.1 | length 381.6
  Top Layer w20: R214.1@1885,3171.54 1885,3135 1830.43,3080.43 1830.43,3019.57 1877.95,2972.05 P200.27@1877.95,2945 1877.95,2917.05 1905,2890 R217.1@1905,2843.46
DIN_7: P200.28 R215.1 R216.1 | length 391.9
  Top Layer w20: R215.1@1945,3171.54 1945,3112.05 P200.28@1877.95,3045 1925.48,2997.47 1925.48,2919.52 1965,2880 R216.1@1965,2843.46
DISPLAY_CS: P101.5 U102.22 | length 1069.5
  Top Layer w10: U102.22@1616.1,4629.45 1616.1,4717.21 1706.64,4807.75 1827.25,4807.75 1835,4815.5 v1(1835,4820)
  Bottom Layer w10: v1(1835,4820) 1835,4790.46 1868.25,4757.2 1868.25,4633.75 1877,4625 1877,4322.54 1955.45,4244.09 P101.5@2047.24,4244.09
DISPLAY_DC: P101.4 U102.21 | length 999.5
  Top Layer w10: U102.21@1635.79,4629.45 1635.79,4711.44 1714.09,4789.75 1880.25,4789.75 v1(1885,4785)
  Bottom Layer w10: v1(1885,4785) 1886.25,4783.75 1886.25,4663.09 1895,4654.34 1895,4330 1949.41,4275.59 P101.4@2047.24,4275.59
DISPLAY_LED_PWM: R108.1 U102.10 | length 1146.7
  Top Layer w10: U102.10@1844.45,4538.9 1893.44,4538.9 1918,4563.46 1918,4672 v1(1915,4675) ; v1(2487,4615) 2487,4548 2474,4535 2474,4367 2516,4325 R108.1@2556.54,4325
  Bottom Layer w10: v1(1915,4675) 2427,4675 v1(2487,4615)
DISPLAY_RST: D106.2 P101.2 R116.1 | length 1540.3
  Top Layer w10: v1(2535,4615) 2535,4568 2492,4525 2492,4380 2507,4365 2575,4365 2590,4350 2590,4230 2623.25,4196.75 2623.25,4126.75 2640,4110 2640,4015 2655,4000 2656.54,4001.54 R116.1@2695,4001.54 D106.2@2695,3921.26
  Bottom Layer w10: P101.2@2047.24,4338.58 2393.58,4338.58 2460,4405 2460,4540 2530,4610 v1@2535,4610
DOORLOCK_COIL: P200.1 P200.2 Q201.5 Q201.6 Q201.7 Q201.8 | length 1213.5
  Top Layer w30: Q201.8@327.87,3870 Q201.7@327.87,3830 Q201.6@327.87,3780 Q201.5@327.87,3730 358,3699.87 358,3458 426,3390 426,2959 445,2940 572.95,2940 P200.1@577.95,2945
  Top Layer w50: P200.1@577.95,2945 P200.2@577.95,3045
DOORLOCK_PWM: R220.2 U102.16 | length 2012.2
  Top Layer w10: v1(1695,4730) 1695,4720 1734.21,4680.79 U102.16@1734.21,4629.45
  Top Layer w20: R220.2@303.46,3940 v1(470,3940)
  Bottom Layer w10: v1(470,3940) 629.09,3940 706.09,4017 872.63,4017 1018,4162.37 1018,4464 1254,4700 1615,4700 1645,4730 v1(1695,4730)
DOUT0: Q202.1 R222.2 U102.14 | length 2735.6
  Top Layer w10: v1(1731.66,4761) 1731.66,4728.34 1773.58,4686.42 U102.14@1773.58,4629.45
  Top Layer w20: v1(73,3639) 104.46,3639 105,3638.46 108.94,3642.4 Q202.1@173.66,3642.4
  Bottom Layer w10: v1(73,3639) 89,3655 629.54,3655 675,3700.46 675,3935 721,3981 887.54,3981 1054,4147.46 1054,4448.46 1269.54,4664 1709,4664 1732.17,4687.17 1731.25,4688.09 1731.25,4751.25 1735,4755 1731.66,4758.34 v1(1731.66,4761)
DOUT1: Q203.1 R223.2 U102.15 | length 2707.8
  Top Layer w10: U102.15@1753.9,4629.45 1753.9,4573.1 v1@1755,4572
  Top Layer w20: v1(73,3483.46) 105,3483.46 108.94,3487.4 Q203.1@173.66,3487.4
  Bottom Layer w10: v1(73,3483.46) 73,3499.93 108.07,3535 451,3535 518.46,3602.46 602.46,3602.46 694,3694 694,3925 732,3963 895,3963 1072,4140 1072,4441 1277,4646 1719,4646 1756,4609 1756,4570.89 v1@1750.11,4565
  other v1: 1755,4570
DOUT2: Q205.1 R229.2 U102.17 | length 2935.1
  Top Layer w10: v1(1665,4695) 1694.54,4695 1714.53,4675.02 U102.17@1714.53,4629.45
  Top Layer w20: v1(73,3325) 130,3325 137.4,3332.4 Q205.1@173.66,3332.4
  Bottom Layer w10: 56.54,3325 18,3363.54 18,3648 45,3675 615,3675 657,3717 657,3942.46 713.54,3999 880.09,3999 1036,4154.91 1036,4455.91 1262.09,4682 1642,4682 1655,4695 v1(1665,4695)
DOUT3: Q209.1 R232.2 U101.4 | length 4703.9
  Top Layer w10: v1(1130,2690) 1140,2700 1716.46,2700 1741.46,2675 1795,2675 v1(1800,2680) ; U101.4@2519.49,3775 2573,3775 v1(2612,3736)
  Top Layer w20: v1(73,3170) 140,3170 147.4,3177.4 Q209.1@173.66,3177.4
  Bottom Layer w10: v1(73,3170) 115,3170 453,2832 868,2832 922,2778 922,2378 950,2350 1040.46,2350 1118,2427.54 1118,2623 1130,2635 v1(1130,2690) ; v1(1800,2680) 1884,2764 2391.91,2764 2465.47,2837.56 2465.47,3045.18 2436.91,3073.75 2415.6,3073.75 2385,3104.34 2385,3170 2415,3200 2590,3200 2630,3240 2630,3718 v1(2612,3736)
DOUT4: Q210.1 R233.2 U101.5 | length 5936.9
  Top Layer w10: U101.5@2519.49,3825 2555,3825 2607,3773 2627,3773 v1(2664,3736)
  Top Layer w20: v1(73,3020) 125,3020 127.4,3022.4 Q210.1@173.66,3022.4
  Bottom Layer w10: v1(73,3020) 199.54,3020 434.54,2785 850,2785 904,2731 904,1756 1023,1637 1557.46,1637 1603,1682.54 1603,2092.54 1720.46,2210 1815,2210 1865,2260 1865,2719.54 1891.46,2746 2596,2746 2649,2799 2649,3721 v1(2664,3736)
DOUT_0: P200.5 Q202.3 | length 1139.1
  Top Layer w20: Q202.3@274,3605 274,3516 325,3465 325,3440 393,3372 393,2942 442,2893 725.95,2893 P200.5@777.95,2945
DOUT_1: P200.7 Q203.3 | length 1161.6
  Top Layer w20: Q203.3@269,3450 365,3354 365,2930 435,2860 835,2860 877.95,2902.95 P200.7@877.95,2945
DOUT_2: P200.9 P200.11 Q205.3 | length 1253.6
  Top Layer w20: Q205.3@275,3295 275,3215 335,3155 335,2920 423,2832 912,2832 977.95,2897.95 P200.9@977.95,2945 P200.11@1077.95,2945
DOUT_3: P200.13 Q209.3 | length 1227.7
  Top Layer w20: Q209.3@274.34,3140 291,3140 305,3126 305,2910 411,2804 1036.95,2804 P200.13@1177.95,2945
DOUT_4: P200.15 Q210.3 | length 1217.3
  Top Layer w20: Q210.3@256.34,2985 256.34,2918.26 398.6,2776 1098,2776 1267,2945 P200.15@1277.95,2945
FLASH_CS: U102.25 U104.1 | length 1769.4
  Top Layer w10: U102.25@1525.55,4578.27 1480.1,4578.27 1464,4594.37 1464,4758.54 1495.46,4790 1640,4790 1680,4830 1800,4830 1825,4855 1875,4855 1885,4845 v1(1885,4825) ; v1(2435,4925) 2436.2,4923.81 2536.2,4923.81 2612,4848 2612,4784 2670,4726 U104.1@2670,4693.86
  Bottom Layer w10: v1(1885,4825) 1905,4825 1954.75,4775.25 2340.25,4775.25 2435,4870 v1(2435,4925)
GUARD_RING: U100.7 | length 5457.5
  Top Layer w20: v1(695,2217.86) 742.14,2265 1395,2265 ; U100.7@1395,2353.46 1395,2265 ; v1(2070,2225) 2030,2265 1395,2265
  Bottom Layer w39.37: 708.66,2322.83 ccw(c393.7,2322.83) 708.66,2322.83 ; 2677.17,2322.83 ccw(c2362.2,2322.83) 2677.17,2322.83